# Altium PCB PCB.PcbDoc
Units mm, origin at the board's own origin, x right, y up, seen from the top; angles counter-clockwise.
Board outline 80 x 80 mm, 2 copper layers (Top Layer, Bottom Layer), stack 1.569 mm thick; 11 components, 6 nets, 93 pads, 0 vias.
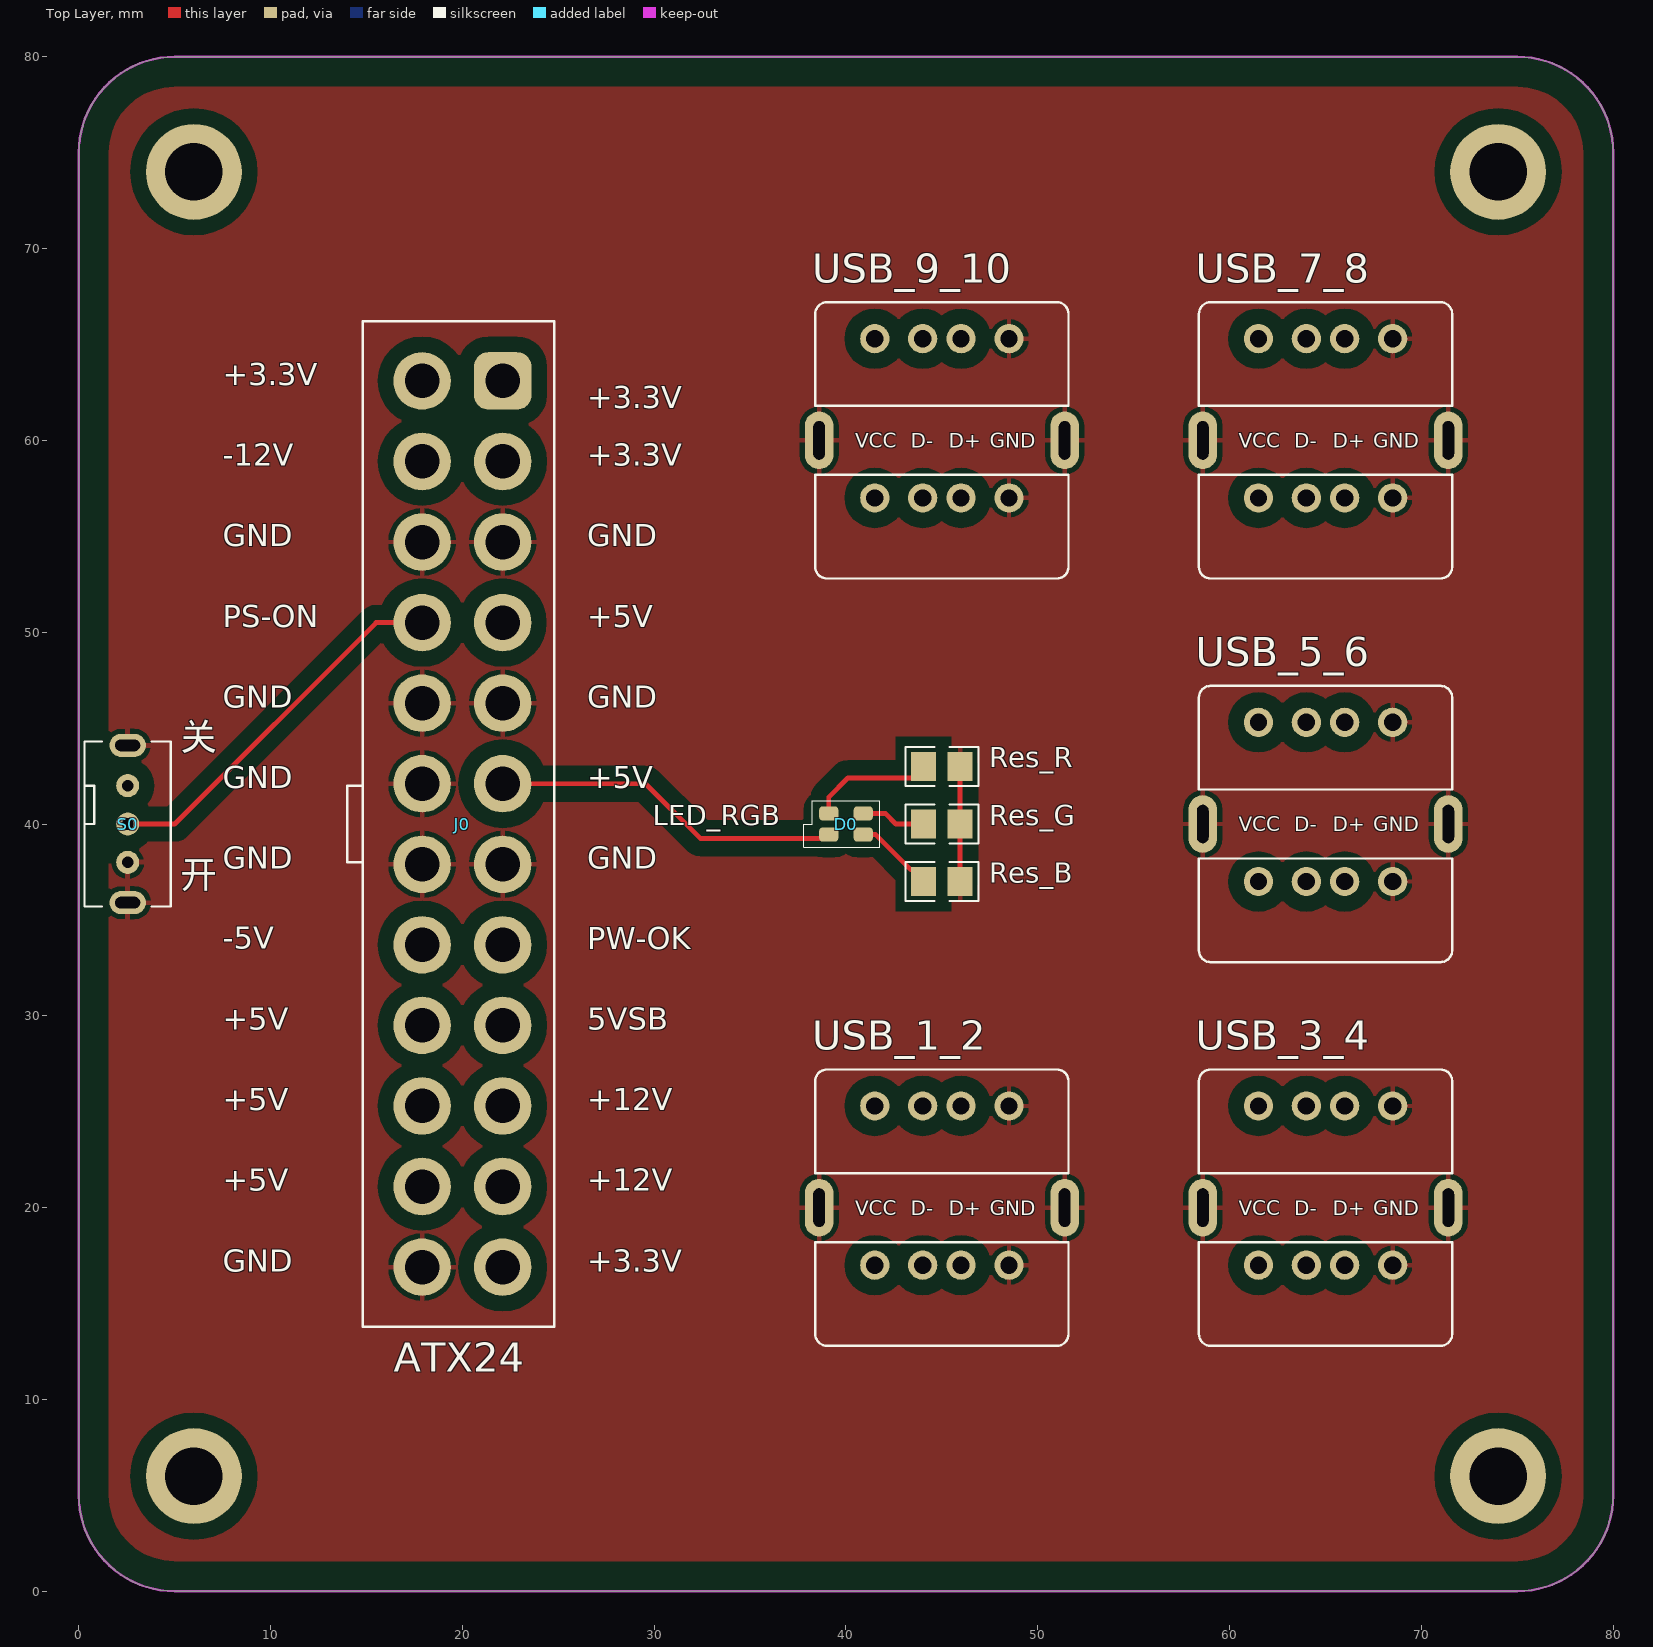
[diagram p0: Top Layer view]
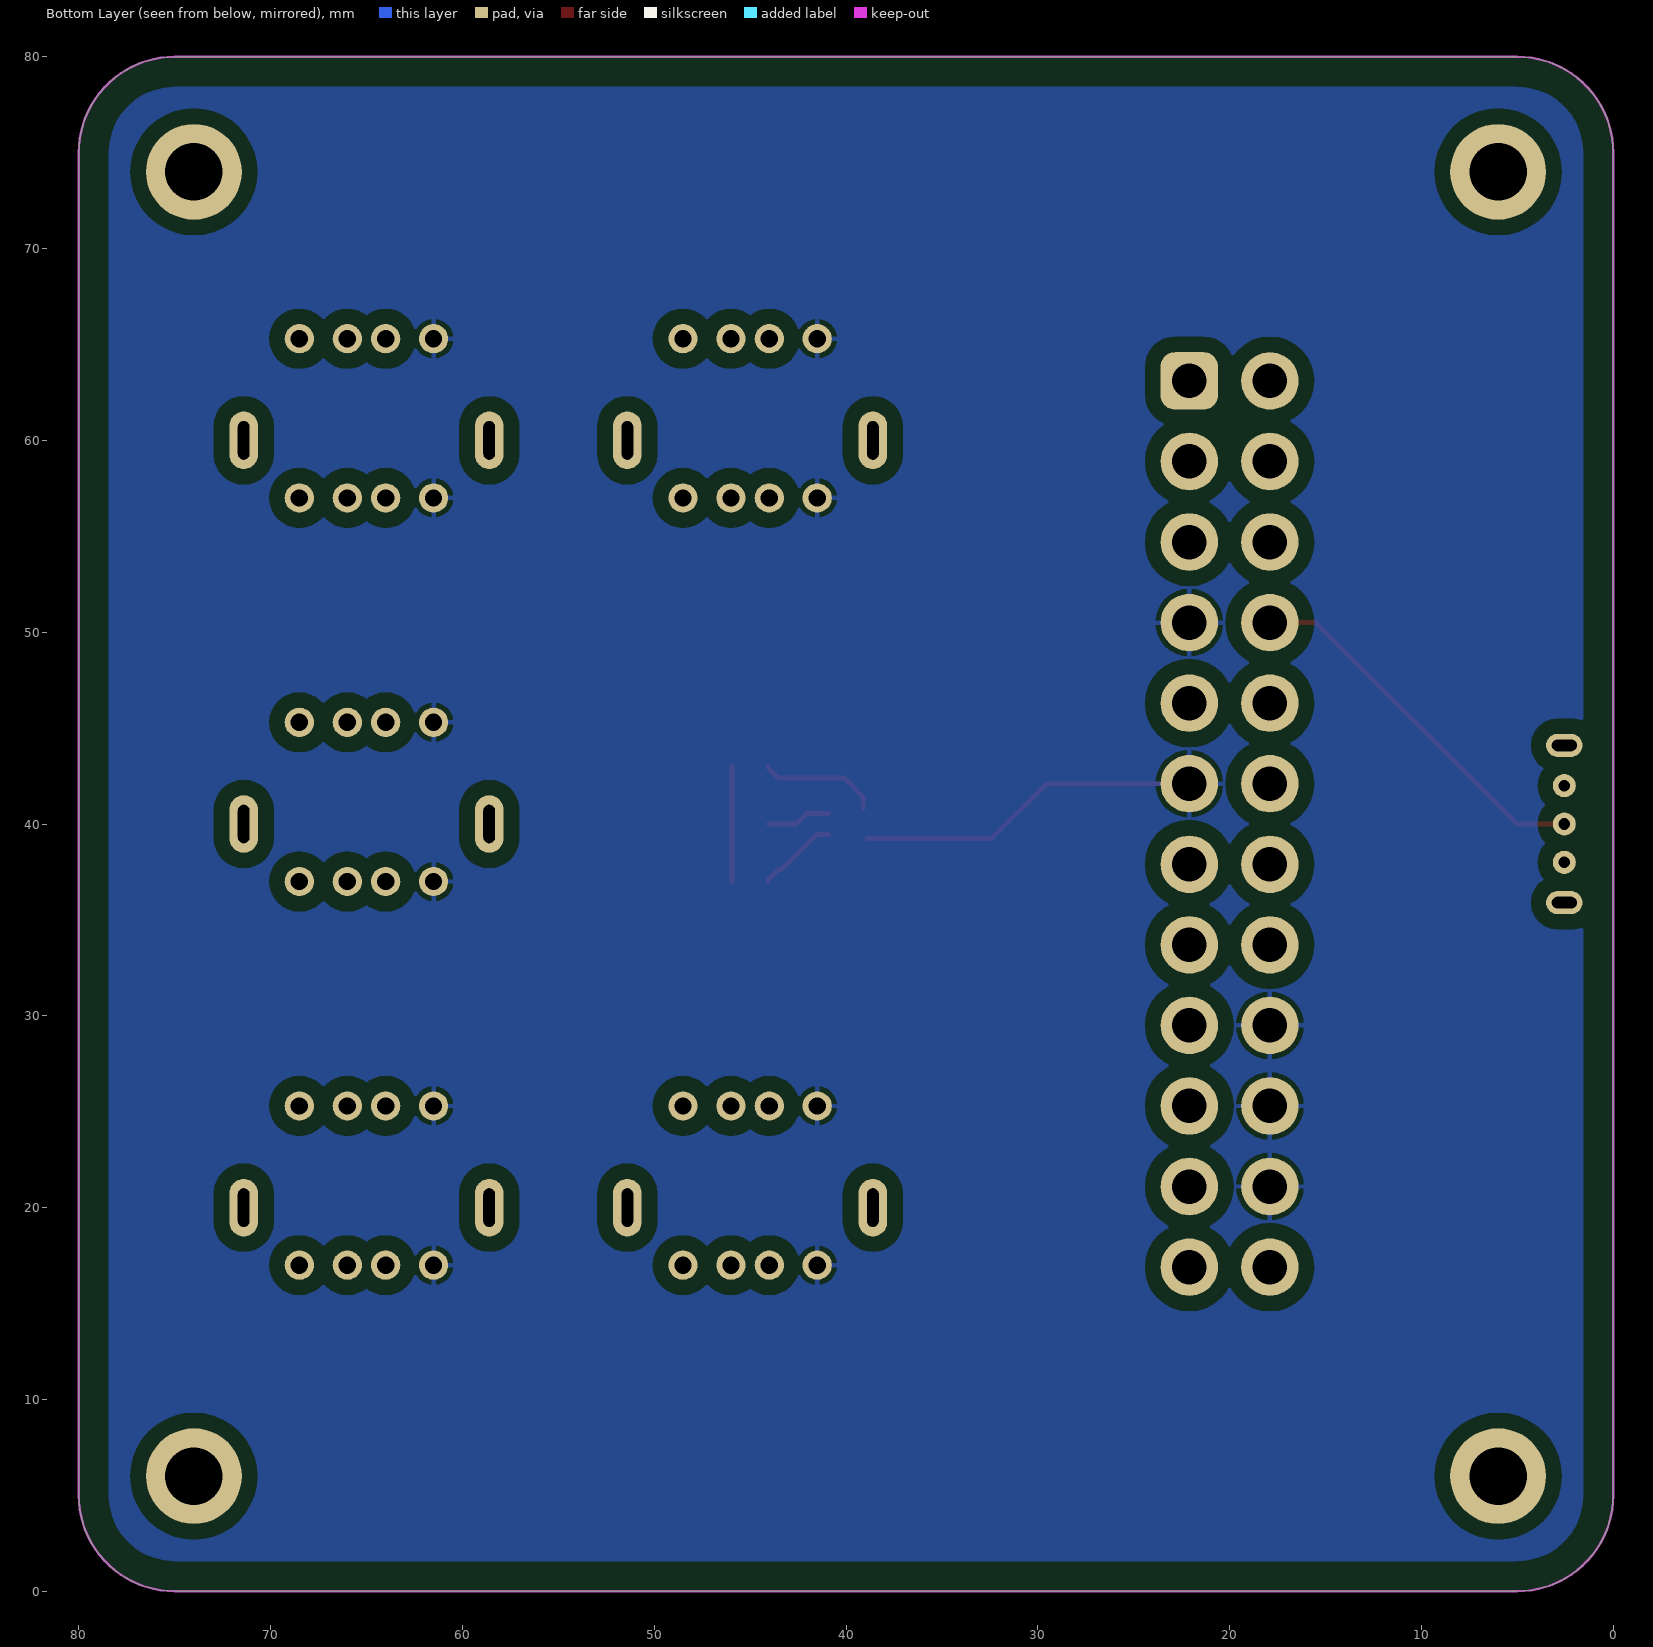
[diagram p1: Bottom Layer view, seen from below]

## Layer stack, top to bottom
Top Solder: solder mask 0.0254, SM-001, Dk 4
Top Layer: signal copper 0.035
Dielectric 1: core 1.4986, Core-043, Dk 4.3
Bottom Layer: signal copper 0.035
Bottom Solder: solder mask 0.0254, SM-001, Dk 4

## Board outline
0,5 0,75 cw(c5,75) 5,80 75,80 cw(c75,75) 80,75 80,5 cw(c75,5) 75,0 5,0 cw(c5,5)

## Design rules (kind name [scope] priority, off if disabled: settings)
Clearance Clearance_Board [All vs OnLayer('Keep-Out Layer')] p1: gap=1.5 ignorepadtopadclearanceinfootprint=TRUE
Clearance PowerOut [InNet('+5V')] p2: gap=0.8 ignorepadtopadclearanceinfootprint=TRUE
Clearance GndOut [InNet('GND')] p3: gap=0.8 ignorepadtopadclearanceinfootprint=TRUE
Clearance [All] p4: gap=0.254 ignorepadtopadclearanceinfootprint=TRUE except(0: Arc-Hole Track-Hole SMDPad-Hole THPad-Hole Via-Hole Fill-Hole Poly-Hole Region-Hole Text-Hole)
HoleSize [All] p1: absolutevalues=TRUE maxlimit=3 minlimit=0.025 maxpercent=80.000 minpercent=20.000
MinimumSolderMaskSliver [All] p1: minsoldermaskwidth=0.127
PolygonConnect [All] p1: thpad.connectstyle=Relief thpad.reliefconductorwidth=0.254 thpad.reliefentries=4 thpad.polygonreliefangle="90 Angle" thpad.airgapwidth=0.254 smdpad.connectstyle=Relief smdpad.reliefconductorwidth=0.254 smdpad.reliefentries=4 smdpad.polygonreliefangle="90 Angle" smdpad.airgapwidth=0.254 via.connectstyle=Direct via.reliefconductorwidth=0.254 via.reliefentries=4 via.polygonreliefangle="90 Angle" via.airgapwidth=0.254
RoutingVias [All] p1: holewidth=0.711 width=1.27 viastyle="Through Hole" minholewidth=0.711 minwidth=1.27 maxholewidth=0.711 maxwidth=1.27
SilkToSolderMaskClearance [IsPad] p1: minsilkscreentomaskgap=0.127 clearancetoexposedcopper=TRUE
SolderMaskExpansion [All] p1: expansion=0.102 istentingtop=FALSE
UnRoutedNet [All] p1: checkbadconnections=TRUE
Width [All] p1: maxlimit=0.254 minlimit=0.254 preferedwidth=0.254
26 further rules are at their usual default settings.

## Components (designator, comment, footprint, x,y, rotation, side; value= is the part's Value field where it differs from the comment)
D0 "LED_RGB" LED_RGB_0805 40,40 r0 top
J0 "ATX24" ATX24-5569 20,40 r180 top
Res_B "Res1" 0805-1 45,37 r180 top value=300R
Res_G "Res1" 0805-1 45,40 r0 top value=300R
Res_R "Res1" 0805-1 45,43 r180 top value=300R
S0 "SW/2" SW/2_SIP3_H 0.3,40 r270 top
USB_1_2 "USB-A_P/2" USB-A_P/2 45,20 r0 top
USB_3_4 "USB-A_P/2" USB-A_P/2 65,20 r0 top
USB_5_6 "USB-A_P/2" USB-A_P/2 65,40 r0 top
USB_7_8 "USB-A_P/2" USB-A_P/2 65,60 r0 top
USB_9_10 "USB-A_P/2" USB-A_P/2 45,60 r0 top

## Footprints (in the part's own frame and the unit in brackets; to place one, negate y for a bottom-side part, rotate by r counter-clockwise, add the part's x,y. Pads: shape width x height; smd on the part's side, far side on the other; paste and mask are expansions set on the pad)
0805-1 [mm] "贴片带丝印"
  rect 1.3x1.5 smd: 1(-0.95,0) 2(0.95,0)
  silkscreen extent -1.91,-1.02 1.91,1.02, body extent -1.14,-0.51 1.14,0.51, height 1
ATX24-5569 [mm] "ATX24母座"
  rrect50% 3x3 hole 1.8: 1(-2.1,-23.1)
  round 3 hole 1.8: 2(-2.1,-18.9) 3(-2.1,-14.7) 4(-2.1,-10.5) 5(-2.1,-6.3) 6(-2.1,-2.1) 7(-2.1,2.1) 8(-2.1,6.3) 9(-2.1,10.5) 10(-2.1,14.7) 11(-2.1,18.9) 12(-2.1,23.1) 13(2.1,-23.1) 14(2.1,-18.9) 15(2.1,-14.7) 16(2.1,-10.5) 17(2.1,-6.3) 18(2.1,-2.1) 19(2.1,2.1) 20(2.1,6.3) 21(2.1,10.5) 22(2.1,14.7) 23(2.1,18.9) 24(2.1,23.1)
  silkscreen extent -4.8,-26.2 6,26.2, body extent -4.8,-26.2 6.2,26.2, height 12.8
LED_RGB_0805 [mm] "LED_RGB (R_2.0-2.2V,G_3.0-3.2V,B_3.0-3.2V) 20mA"
  rrect50% 1x0.75 smd: 1(-0.9,0.55) 2(0.9,0.55) 3(0.9,-0.55) 4(-0.9,-0.55)
  silkscreen extent -2.2,-1.2 1.75,1.2, body extent -0.8,-0.75 0.8,0.75, height 0.34
SW/2_SIP3_H [mm] "拨动开关 二档三脚 侧卧式 https://item.taobao.com/item.htm?id=553250663418"
  oval 1.2x1.9 hole 0.6 slot 1.3 at 90 deg: 0(-4.1,2.25) 0(4.1,2.25)
  round 1.2 hole 0.6: 1(-2,2.25) 2(0,2.25) 3(2,2.25)
  silkscreen extent -4.3,0 4.3,4.5, body extent -4.3,-2 4.3,4.5, height 4.75
USB-A_P/2 [mm] "USB-A 双层 180度 平口 母座 https://item.taobao.com/item.htm?id=554777564164"
  oval 1.5x3 hole 0.6 slot 2 at 90 deg: 0(-6.4,0) 0(6.4,0)
  round 1.524 hole 0.9: 1(-3.5,-3) 2(-1,-3) 3(1,-3) 4(3.5,-3) 5(3.5,5.3) 6(1,5.3) 7(-1,5.3) 8(-3.5,5.3)
  silkscreen extent -6.6,-7.2 6.6,7.2

## Part data
J0: library part ATX24_5569, "ATX24_5569 供电母座"
Res_B Res_G Res_R: "贴片电阻", LatestRevisionDate=17-Jul-2002, LatestRevisionNote="Re-released for DXP Platform.", PackageReference=AXIAL-0.4, Published=8-Jun-2000, Publisher="Altium Limited"
S0: "2档拨动开关"
USB_1_2 USB_3_4 USB_5_6 USB_7_8 USB_9_10: "USB-A 双层 180度 母座"

## Free pads (board coordinates)
  round 5 hole 3: 1(6,6) 1(6,74) 1(74,6) 1(74,74)

## Nets (pads, with @x,y where several pads share a name; then routed paths per layer and width w, separated by ;. In a path a pad name is that pad's centre, name@x,y a point inside that pad or via, vN(x,y) a via of type N, cw(c..) or ccw(c..) an arc to the next point about the centre after c; other vN are vias at no path point)
+5V: D0.4 J0.4 J0.6 J0.21 J0.22 J0.23 USB_1_2.1 USB_1_2.8 USB_3_4.1 USB_3_4.8 USB_5_6.1 USB_5_6.8 USB_7_8.1 USB_7_8.8 USB_9_10.1 USB_9_10.8 | length 18
  Top Layer w0.254: J0.6 29.547,42.1 32.399,39.248 D0.4@38.898,39.248
GND: J0.3 J0.5 J0.7 J0.15 J0.17 J0.18 J0.19 J0.24 Res_B.1 Res_G.2 Res_R.1 S0.0 S0.3 USB_1_2.0 USB_1_2.4 USB_1_2.5 USB_3_4.0 USB_3_4.4 USB_3_4.5 USB_5_6.0 USB_5_6.4 USB_5_6.5 USB_7_8.0 USB_7_8.4 USB_7_8.5 USB_9_10.0 USB_9_10.4 USB_9_10.5 | length 6
  Top Layer w0.254: Res_B.1 Res_G.2 Res_R.1
NetD0_1: D0.1 Res_R.2 | length 6.3
  Top Layer w0.254: D0.1@39.1,40.8 39.1,41.4 40.1,42.4 43.527,42.4 44.05,42.923 Res_R.2
NetD0_2: D0.2 Res_G.1 | length 3.4
  Top Layer w0.254: D0.2 42.05,40.55 42.6,40 Res_G.1
NetD0_3: D0.3 Res_B.2 | length 4.2
  Top Layer w0.254: D0.3 41.55,39.45 43.377,37.623 43.527,37.623 44.05,37.1 Res_B.2
NetJ0_16: J0.16 S0.2 | length 19.7
  Top Layer w0.254: S0.2 5,40 15.5,50.5 J0.16
pads on no net: J0.1 J0.2 J0.8 J0.9 J0.10 J0.11 J0.12 J0.13 J0.14 J0.20 S0.1 USB_1_2.2 USB_1_2.3 USB_1_2.6 USB_1_2.7 USB_3_4.2 USB_3_4.3 USB_3_4.6 USB_3_4.7 USB_5_6.2 USB_5_6.3 USB_5_6.6 USB_5_6.7 USB_7_8.2 USB_7_8.3 USB_7_8.6 USB_7_8.7 USB_9_10.2 USB_9_10.3 USB_9_10.6 USB_9_10.7

## Polygon pours and split planes (outlines as drawn)
no net on Multi-Layer (solid): 0,0
GND on Top Layer "Copper_GND" (solid, pour order 3): 0,0 80,0 80,80 0,80
+5V on Top Layer "+5V_L01_P001" (solid, pour order 1): 88,20
+5V on Bottom Layer "Copper_VCC" (solid, pour order 4): 0,0 80,0 80,80 0,80

## Keep-outs
Keep-Out Layer:
  region: 0,46
  lines w0.127: 0,5 ccw(c5,5) 5,0 75,0 ccw(c75,5) 80,5 80,75 ccw(c75,75) 75,80 5,80 ccw(c5,75) 0,75 0,5

## Other copper
Top Layer:
  pour cut-out: 0,42.4
  pour cut-out: 0.8,45
Bottom Layer:
  pour cut-out: 0,46

## Silkscreen, mask and mechanical layers (free items; w line width, h text height)
Top Overlay:
  text "关 /  /  / 开" at 5.3,36.2 h2.4

## Text inside footprints (layer, text, board x,y; h text height)
J0: Top Overlay "+3.3V" at 26.5,61.293 h2; Top Overlay "+3.3V" at 26.5,58.294 h2; Top Overlay "+5V" at 26.5,49.877 h2; Top Overlay "GND" at 26.5,45.677 h2; Top Overlay "+12V" at 26.5,20.477 h2; Top Overlay "PW-OK" at 26.5,33.077 h2; Top Overlay "GND" at 26.5,37.277 h2; Top Overlay "GND" at 7.5,54.077 h2; Top Overlay "+12V" at 26.5,24.677 h2; Top Overlay "GND" at 7.5,16.277 h2; Top Overlay "GND" at 7.5,41.477 h2; Top Overlay "-5V" at 7.5,33.094 h2; Top Overlay "+5V" at 26.5,41.477 h2; Top Overlay "+5V" at 7.5,20.477 h2; Top Overlay "GND" at 7.5,37.277 h2; Top Overlay "GND" at 7.5,45.677 h2; Top Overlay "PS-ON" at 7.5,49.877 h2; Top Overlay "-12V" at 7.5,58.294 h2; Top Overlay "+3.3V" at 26.5,16.277 h2; Top Overlay "+5V" at 7.5,24.677 h2; Top Overlay "+3.3V" at 7.5,62.494 h2; Top Overlay "GND" at 26.5,54.077 h2; Top Overlay "+5V" at 7.5,28.894 h2; Top Overlay "5VSB" at 26.5,28.877 h2
USB_1_2: Top Overlay "D-" at 43.365,19.611 h0.76; Top Overlay "GND" at 47.484,19.611 h0.76; Top Overlay "D+" at 45.365,19.611 h0.76; Top Overlay "VCC" at 40.484,19.611 h0.76
USB_3_4: Top Overlay "D-" at 63.365,19.611 h0.76; Top Overlay "GND" at 67.484,19.611 h0.76; Top Overlay "D+" at 65.365,19.611 h0.76; Top Overlay "VCC" at 60.484,19.611 h0.76
USB_5_6: Top Overlay "D-" at 63.365,39.611 h0.76; Top Overlay "GND" at 67.484,39.611 h0.76; Top Overlay "D+" at 65.365,39.611 h0.76; Top Overlay "VCC" at 60.484,39.611 h0.76
USB_7_8: Top Overlay "D-" at 63.365,59.611 h0.76; Top Overlay "GND" at 67.484,59.611 h0.76; Top Overlay "D+" at 65.365,59.611 h0.76; Top Overlay "VCC" at 60.484,59.611 h0.76
USB_9_10: Top Overlay "D-" at 43.365,59.611 h0.76; Top Overlay "GND" at 47.484,59.611 h0.76; Top Overlay "D+" at 45.365,59.611 h0.76; Top Overlay "VCC" at 40.484,59.611 h0.76